# EAGLE board Qwiic GPS-RTK - ublox NEO-M8P-Panel - Single (EAGLE 9.1.1)
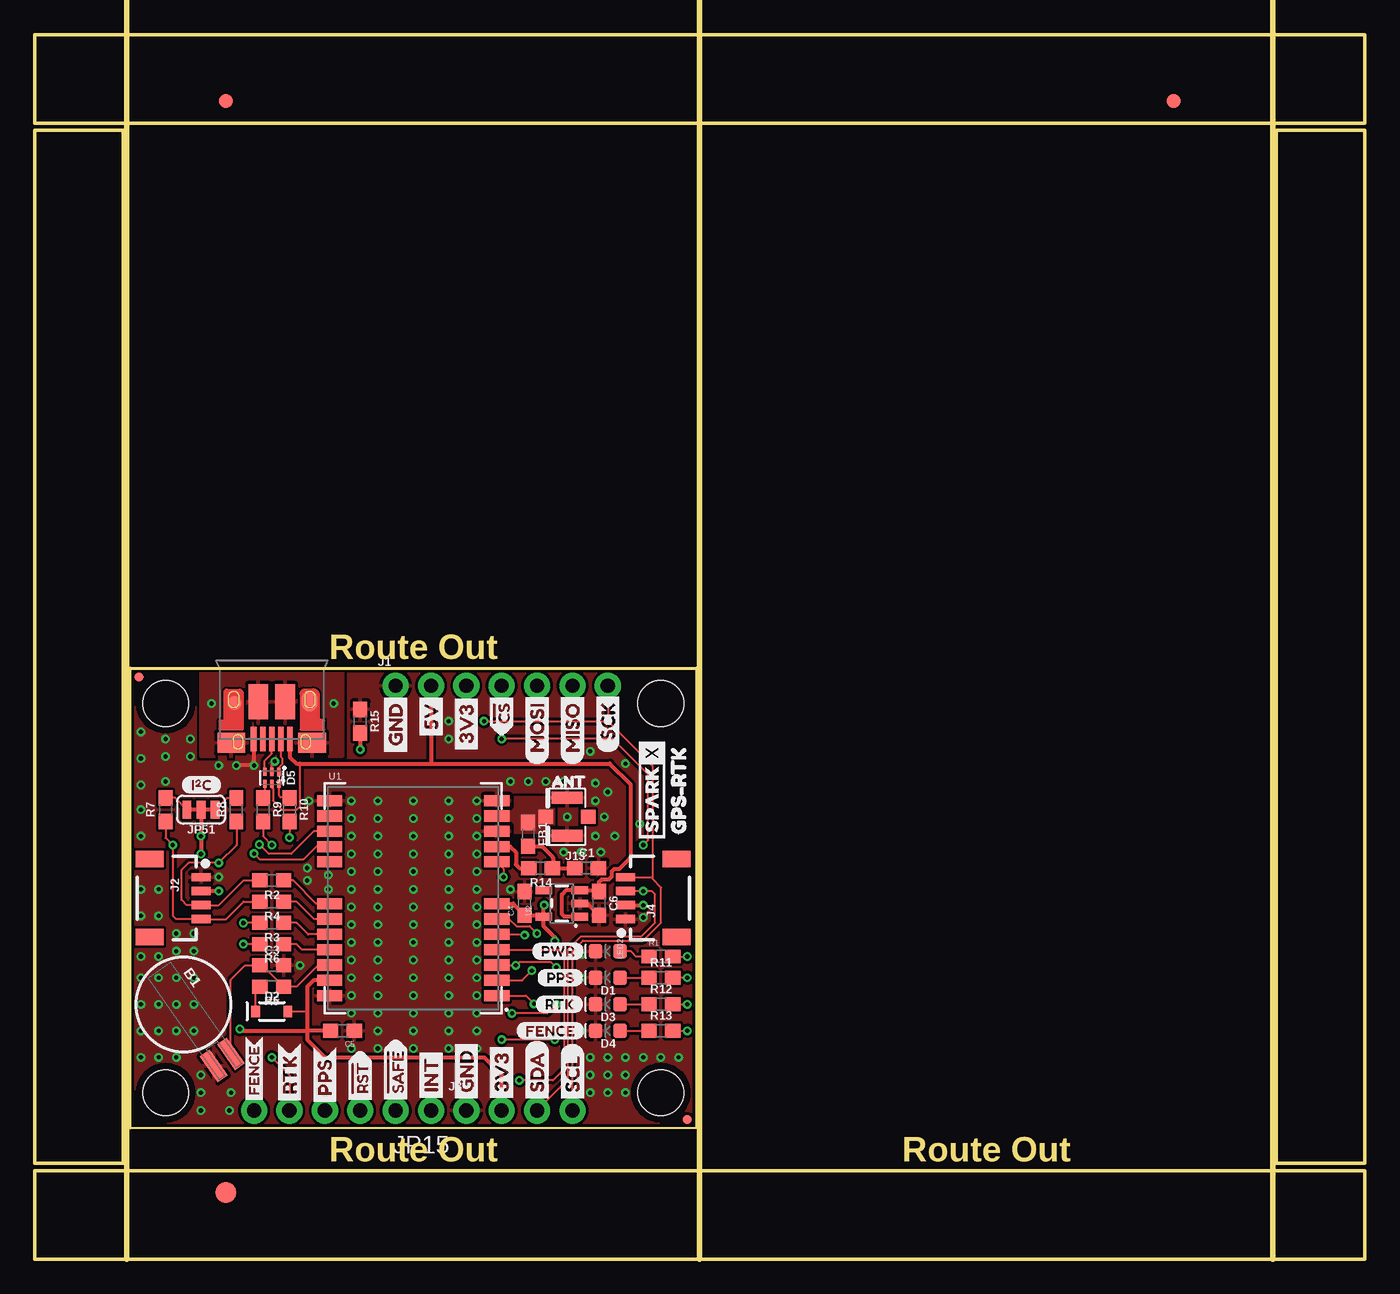
[diagram p0: board, top side]
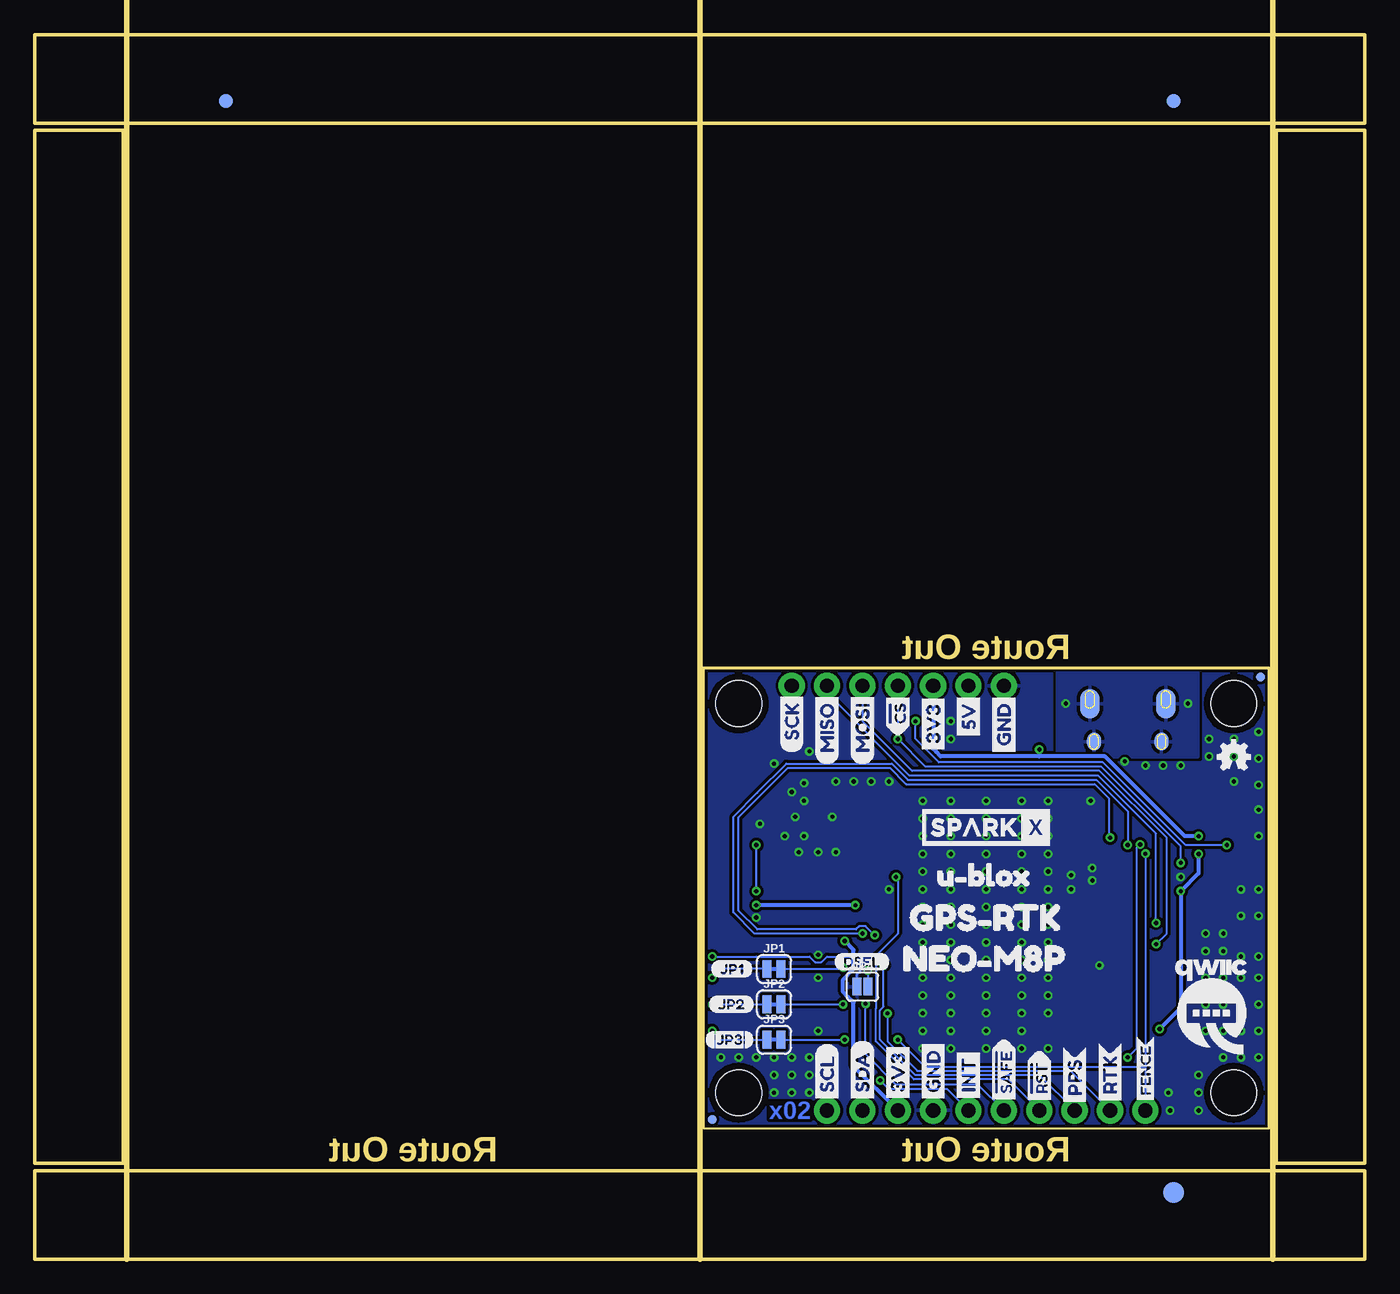
[diagram p1: board, bottom side, seen from below]

Size 95.5 x 87.88 mm. Coordinates in mm from the lower left corner, seen from the top.
Outline: 6.86,9.4 6.86,42.42 47.5,42.42 47.5,9.4 6.86,9.4
Outline: 0,6.35 95.5,6.35 95.5,0 0,0 0,6.35
Outline: 89.15,81.03 95.5,81.03 95.5,6.86 89.15,6.86 89.15,81.03
Outline: 0,87.88 95.5,87.88 95.5,81.53 0,81.53 0,87.88
Outline: 0,81.03 6.35,81.03 6.35,6.86 0,6.86 0,81.03
Copper layers (1*16): Top 0.035mm / dielectric 1.5mm / Bottom 0.035mm
Design rules "SparkFun-2-layer-PCBWay-LIMIT": minimum track width 6mil, minimum drill 0.3mm, track to track 6mil, track to pad 6mil, pad to pad 6mil, via to via 6mil, smd to smd 6mil, copper to edge 6mil, drill to drill 6mil, minimum pad ring 6mil, minimum via ring 6mil, stop-mask expansion 4mil, vias tented up to drill 25mil, thermal gap 10mil
Milling: 3 lines

## Footprints (pad centres in the part's own frame; a part is rotated, then mirrored left to right if it is on the bottom)
BATTCON-6.8MM = smd 2.25 x 0.85: + 4.87,0.75; - 4.87,-0.75
0603 = smd 1.1 x 1: 1 -0.85,0; 2 0.85,0
LED-0603 = smd 1 x 1: A -0.877,0; C 0.877,0
SOD-323 = smd 0.63 x 0.83: A 1.15,0; C -1.15,0
SOT886 = smd 0.61 x 0.25: 1 -0.405,0.5 | smd 0.56 x 0.25: 2 -0.43,0; 3 -0.43,-0.5; 4 0.43,-0.5; 5 0.43,0; 6 0.43,0.5
FIDUCIAL-1X2 = smd 1 x 1: 1 0,0
FIDUCIAL-1.5X3 = smd 1.5 x 1.5: 1 0,0
1X07_NO_SILK = drill 1.016 pad 1.88: 1 0,0; 2 2.54,0; 3 5.08,0; 4 7.62,0; 5 10.16,0; 6 12.7,0; 7 15.24,0
1X04_1MM_RA = smd 0.6 x 1.35: 1 -1.5,0; 2 -0.5,0; 3 0.5,0; 4 1.5,0 | smd 1.2 x 2: NC1 2.8,-3.675; NC2 -2.8,-3.675
1X04_NO_SILK = drill 1.016 pad 1.88: 1 0,0; 2 2.54,0; 3 5.08,0; 4 7.62,0
USB-MICROB-PTH-MILL = smd 0.4 x 1.75: D+ 0,0; D- -0.65,0; GND 1.3,0; ID 0.65,0; VBUS -1.3,0 | smd 2 x 1.46: SHIELD -2.9,0.275; SHIELD2 2.9,0.275 | smd 1.425 x 2.5: SHIELD3 -0.963,-2.675; SHIELD4 0.963,-2.675 | smd 1.4 x 2.1 bottom: SHIELD5 -2.731,-2.531; SHIELD7 2.729,-2.531 | smd 1 x 1: SHIELD6 2.7,-2.575 | smd 1.1 x 1.5: SHIELD8 -2.731,-2.731 | smd 1 x 1.3 bottom: SHIELD9 -2.43,0.195; SHIELD10 2.43,0.195
U.FL = smd 2.2 x 0.85: 1 0,1.375; 2 0,-1.375 | smd 1.05 x 1: FEED 1.525,0; NC -1.525,0
SMT-JUMPER_2_NC_TRACE_SILK = smd 0.635 x 1.27: 1 -0.508,0; 2 0.508,0
SMT-JUMPER_2_NO_SILK = smd 0.635 x 1.27: 1 -0.406,0; 2 0.406,0
1X06_NO_SILK = drill 1.016 pad 1.88: 1 0,0; 2 2.54,0; 3 5.08,0; 4 7.62,0; 5 10.16,0; 6 12.7,0
MICRO-FIDUCIAL = smd 0.635 x 0.635: 1 0,0
STAND-OFF = hole 3.302: 0,0
SMT-JUMPER_3_2-NC_TRACE_SILK = smd 0.635 x 1.27: 1 -1.016,0; 2 0,0; 3 1.016,0
NEO-M8P = smd 1.8 x 0.8: 1 6,-7; 2 6,-5.9; 3 6,-4.8; 4 6,-3.7; 5 6,-2.6; 6 6,-1.5; 7 6,-0.4; 8 6,2.6; 9 6,3.7; 10 6,4.8; 11 6,5.9; 12 6,7; 13 -6,7; 14 -6,5.9; 15 -6,4.8; 16 -6,3.7; 17 -6,2.6; 18 -6,-0.4; 19 -6,-1.5; 20 -6,-2.6; 21 -6,-3.7; 22 -6,-4.8; 23 -6,-5.9; 24 -6,-7
SOT23-5 = smd 0.55 x 1.2: 1 -0.95,-1.3; 2 0,-1.3; 3 0.95,-1.3; 4 0.95,1.3; 5 -0.95,1.3

## Placement (x,y rotation side)
B1  6.8MM_COIN_CELL  [BATTCON-6.8MM]  10.67,18.29 305 top
C1  47pF  [0603]  39.62,28.07 0 top
C3  1.0uF  [0603]  17.02,21.08 0 top
C4  1.0uF  [0603]  35.18,25.53 90 top
C5  0.1uF  [0603]  22.1,16.38 180 top
C6  1.0uF  [0603]  40.51,25.53 270 top
D1  BLUE  [LED-0603]  41.15,20.19 180 top
D2  0.5A/40V/420mV  [SOD-323]  17.02,17.78 0 top
D3  GREEN  [LED-0603]  41.15,18.29 180 top
D4  BLUE  [LED-0603]  41.15,16.38 180 top
D5  PRTR5V0U2F  [SOT886]  17.02,34.54 270 top
E$1  [FIDUCIAL-1X2]  13.72,83.12 0 top
E$2  [FIDUCIAL-1X2]  13.72,83.12 0 bottom
E$3  [FIDUCIAL-1X2]  81.79,83.12 0 top
E$4  [FIDUCIAL-1X2]  81.79,83.12 0 bottom
E$5  [FIDUCIAL-1.5X3]  13.72,4.76 0 top
E$6  [FIDUCIAL-1.5X3]  13.72,4.76 0 bottom
FB1  30Ω/1.8A  [0603]  35.43,30.48 270 top
J1  [1X07_NO_SILK]  25.91,41.15 0 top
J2  [1X04_1MM_RA]  11.94,25.91 270 top
J3  PTH  [1X04_NO_SILK]  30.99,10.67 0 top
J4  [1X04_1MM_RA]  42.42,25.91 90 top
J6  [USB-MICROB-PTH-MILL]  17.02,37.34 180 top
J13  U.FL  [U.FL]  38.23,31.75 180 top
JP1  [SMT-JUMPER_2_NC_TRACE_SILK]  42.42,20.83 0 bottom
JP2  [SMT-JUMPER_2_NC_TRACE_SILK]  42.42,18.29 0 bottom
JP3  [SMT-JUMPER_2_NC_TRACE_SILK]  42.42,15.75 0 bottom
JP4  [SMT-JUMPER_2_NO_SILK]  36.07,19.56 0 bottom
JP15  SPI  [1X06_NO_SILK]  28.45,10.67 180 top
JP21  FIDUCIALUFIDUCIAL  [MICRO-FIDUCIAL]  46.86,10.03 0 top
JP31  STAND-OFF  [STAND-OFF]  9.4,39.88 0 top
JP41  STAND-OFF  [STAND-OFF]  44.96,39.88 0 top
JP51  [SMT-JUMPER_3_2-NC_TRACE_SILK]  11.94,32.26 180 top
JP61  FIDUCIALUFIDUCIAL  [MICRO-FIDUCIAL]  7.49,41.78 0 top
JP71  FIDUCIALUFIDUCIAL  [MICRO-FIDUCIAL]  46.86,10.03 0 bottom
JP81  FIDUCIALUFIDUCIAL  [MICRO-FIDUCIAL]  7.49,41.78 0 bottom
JP91  STAND-OFF  [STAND-OFF]  9.4,11.94 0 top
JP101  STAND-OFF  [STAND-OFF]  44.96,11.94 0 top
LED2  RED  [LED-0603]  41.15,22.1 180 top
LOGO1  OSHW-LOGOMINI  [OSHW-LOGO-MINI]  9.4,36.07 0 bottom
R1  1k  [0603]  44.96,21.72 0 top
R2  33  [0603]  17.02,27.18 180 top
R3  33  [0603]  17.02,24.13 180 top
R4  33  [0603]  17.02,25.65 180 top
R5  1k  [0603]  17.02,19.56 180 top
R6  33  [0603]  17.02,22.61 180 top
R7  2.2k  [0603]  9.4,32.26 90 top
R8  2.2k  [0603]  14.48,32.26 90 top
R9  27  [0603]  16.38,32.26 270 top
R10  27  [0603]  18.29,32.26 270 top
R11  1k  [0603]  44.96,20.19 0 top
R12  1k  [0603]  44.96,18.29 0 top
R13  1k  [0603]  44.96,16.38 0 top
R14  10  [0603]  36.32,28.07 180 top
R15  100k  [0603]  23.37,38.61 270 top
U1  NEO-M8P  [NEO-M8P]  27.18,25.91 0 top
U2  3.3V  [SOT23-5]  37.85,25.53 90 top
U$1  [SDA-[)]  36.07,11.05 90 top
U$2  SPARKX-LOGO4  [SPARKX-MEDIUM]  27.18,30.99 0 bottom
U$3  [SCL-[)]  38.61,11.05 90 top
U$4  [SDA-[)]  36.07,11.05 90 bottom
U$5  [SCL-[)]  38.61,11.05 90 bottom
U$6  [3V3-04]  33.53,11.05 90 top
U$7  [3V3-04]  33.53,11.05 90 bottom
U$8  [GND-04]  30.99,11.05 90 top
U$9  [GND-04]  30.99,11.05 90 bottom
U$10  [I_SUPER2_C-()-03]  10.54,34.04 0 top
U$11  [FENCE2]  34.54,16.38 0 top
U$12  [JP20]  47.12,18.29 0 bottom
U$13  [RTK1]  35.94,18.29 0 top
U$14  [FENCE0]  15.75,11.05 90 top
U$15  [INT8]  28.45,11.05 90 top
U$16  [INT8]  28.45,11.05 90 bottom
U$17  [FENCE0]  15.75,11.05 90 bottom
U$18  [PWR-()-03]  35.69,22.1 0 top
U$19  [5V]  28.45,37.08 90 top
U$20  [5V]  28.45,37.08 90 bottom
U$21  [GPS#RTK0]  46.23,29.59 90 top
U$22  [U#BLOX3]  32.13,27.56 0 bottom
U$23  [CS#-<]]  33.53,37.34 90 top
U$24  [CS#-<]]  33.53,37.34 90 bottom
U$25  [JP10]  46.99,20.83 0 bottom
U$26  [MISO-(]-04]  38.61,35.43 90 top
U$27  [DSEL0]  38.1,21.34 0 bottom
U$28  [RTK1]  18.29,10.92 90 bottom
U$29  [RTK1]  18.29,10.92 90 top
U$30  [QWIIC-LOGO-MEDIUM]  11.05,18.16 0 bottom
U$31  SPARKX-LOGO3  [SPARKX-SMALL]  44.32,33.66 90 top
U$32  [JP32]  47.37,15.75 0 bottom
U$33  [MISO-(]-04]  38.61,35.43 90 bottom
U$34  [MOSI-(]-04]  36.07,35.43 90 top
U$35  [#RST3]  23.37,10.79 90 top
U$36  [#RST3]  23.37,10.79 90 bottom
U$37  [MOSI-(]-04]  36.07,35.43 90 bottom
U$38  [SCK-(]-04]  41.15,36.32 90 top
U$39  [#SAFE1]  25.91,10.79 90 top
U$40  [#SAFE1]  25.91,10.79 90 bottom
U$41  [SCK-(]-04]  41.15,36.32 90 bottom
U$43  [PPS5]  20.83,10.79 90 top
U$44  [PPS5]  20.83,10.79 90 bottom
U$52  [PPS0]  36.07,20.19 0 top
U$53  [NEO#M8P3]  34.8,21.59 0 bottom
U$54  [GPS#RTK1]  34.29,24.51 0 bottom
U$55  [ANT0]  36.45,34.29 0 top
U$60  [3V3-04]  30.99,36.07 90 bottom
U$61  [3V3-04]  30.99,36.07 90 top
U$62  [GND-04]  25.91,35.94 90 bottom
U$63  [GND-04]  25.91,35.94 90 top

## Library data of the parts
B1 = SparkFun-Batteries; PROD_ID: BATT-13734
C1 = SparkFun-Capacitors; PROD_ID: CAP-08913
C3 C4 C6 = SparkFun-Capacitors; PROD_ID: CAP-00868
C5 = SparkFun-Capacitors; PROD_ID: CAP-00810
D1 D4 = SparkFun-LED; PROD_ID: DIO-08575
D2 = SparkFun-DiscreteSemi; PROD_ID: DIO-10955
D3 = SparkFun-LED; PROD_ID: DIO-00821
D5 = funbit
E$1-E$4 LOGO1 = SparkFun-Aesthetics
E$5 E$6 = SparkFun-Retired
FB1 = SparkFun-Coils; PROD_ID: NDUC-13805
J1 = SparkFun-Connectors
J2 J4 = SparkFun-Connectors; PROD_ID: CONN-13694; VALUE: Qwiic Right Angle
J3 U$2 U$31 = SparkX
J6 = SparkFun-Connectors; PROD_ID: CONN-13711
J13 = SparkFun-Connectors; PROD_ID: CONN-09193; SF_ID: WRL-09144
JP1-JP4 JP51 = SparkFun-Jumpers
JP15 = SparkFun-Connectors; PROD_ID: CONN-08437
JP21 JP31 JP41 JP61 JP71 JP81 JP91 JP101 = SparkFun
LED2 = SparkFun-LED; PROD_ID: DIO-00819
R1 R5 R11-R13 = SparkFun-Resistors; PROD_ID: RES-07856
R2-R4 R6 = SparkFun-Resistors; PROD_ID: RES-08270
R7 R8 = SparkFun-Resistors; PROD_ID: RES-08272
R9 R10 = SparkFun-Resistors; PROD_ID: RES-09334
R14 = SparkFun-Resistors; PROD_ID: RES-12581
R15 = SparkFun-Resistors; PROD_ID: RES-07828
U1 = NEO-M8P
U2 = SparkFun-IC-Power; PROD_ID: VREG-12457
U$1 U$3-U$10 U$18-U$20 U$23 U$24 U$26 U$30 U$33 U$34 U$37 U$38 U$41 U$60-U$63 = Labels
U$11-U$13 = buzzard_labels
U$14 U$17 U$28 U$29 = buzzard_labels (1)
U$15 U$16 U$22 U$25 U$32 = buzzard_labels (5)
U$21 = buzzard_labels (3)
U$27 = buzzard_labels (6)
U$35 U$36 U$39 U$40 U$43 U$44 U$53 = buzzard_labels (7)
U$52 = buzzard_labels (33)
U$54 = buzzard_labels (8)
U$55 = buzzard_labels (9)

## Nets
3.3V: C4.1 C5.2 D2.A J1.3 J2.2 J3.2 J4.2 JP51.2 R1.2 R15.2 U1.7 U1.23 U2.5
5V: C6.1 D5.5 J1.2 J6.VBUS U2.1 U2.3
!RESET: JP15.3 U1.8
!SAFE: JP15.2 U1.1
ANT_VCC: C1.1 FB1.2 R14.1
BACKUP: B1.+ C3.1 R5.1 U1.22
D+: D5.4 R9.1
D-: D5.6 R10.1
D_SEL: JP4.2 U1.2
FENCE_STAT: JP3.2 JP15.6 U1.16
GND: B1.- C1.2 C3.2 C4.2 C5.1 C6.2 D1.C D3.C D4.C D5.2 J1.1 J2.1 J3.1 J4.1 J6.GND J13.1 J13.2 JP4.1 LED2.C R15.1 U1.10 U1.12 U1.13 U1.24 U2.2
GPS_ANT1: FB1.1 J13.FEED U1.11
INT: JP15.1 U1.4
N$1: D3.A R12.1
N$2: D1.A R11.1
N$3: JP2.1 R12.2
N$4: JP1.1 R11.2
N$5: JP51.1 R8.2
N$6: D2.C R5.2
N$7: D4.A R13.1
N$8: JP51.3 R7.2
N$9: JP3.1 R13.2
N$10: LED2.A R1.1
N$11: R9.2 U1.6
N$12: R10.2 U1.5
N$13: R14.2 U1.9
PPS: JP1.2 JP15.4 U1.3
RTK_STAT: JP2.2 JP15.5 U1.15
RXI/MOSI: J1.5 R6.2
RXLV: R6.1 U1.21
SCL/SCK: J1.7 J2.4 J3.4 J4.4 R4.2 R7.1
SCL_LV: R4.1 U1.19
SDA/!CS: J1.4 J2.3 J3.3 J4.3 R2.2 R8.1
SDA_LV: R2.1 U1.18
SHLD: J6.SHIELD J6.SHIELD2 J6.SHIELD3 J6.SHIELD4 J6.SHIELD5 J6.SHIELD6 J6.SHIELD7 J6.SHIELD8 J6.SHIELD9 J6.SHIELD10
TXLV: R3.1 U1.20
TXO/MISO: J1.6 R3.2
USB_D+: D5.3 J6.D+
USB_D-: D5.1 J6.D-

## Tracks (layer width: path | path; a pad name or v marks a point on that pad's centre or on a via)
3.3V  (via drill 0.3)
  Top 0.152: v11.94,30.35 JP51.2 | R1.2 v46.86,21.72 | D2.A 19.56,17.78
  Top 0.305: v13.21,26.41 J2.2 | JP51.2 v11.94,29.08 | U1.7 34.35,25.51 C4.1 36.45,24.68 U2.5 | U2.5 36.55,25.37 v36.58,25.4 | J4.2 v43.69,25.4 | v37.34,22.84 37.34,23.11 36.55,23.91 U2.5 | J3.2 33.53,13.21 32.26,14.48 20.83,14.48 19.56,15.75 19.56,16.38 | U1.23 20.01,20.01 19.56,19.56 19.56,17.78 19.56,16.38 | C5.2 19.56,16.38 | v14.73,16.51 14.86,16.38 19.56,16.38 | R15.2 v23.37,36.58
  Bottom 0.152: v46.86,21.72 43.69,21.72 39.87,21.72 39.46,21.31 39.02,21.31 38.62,21.72 36.7,21.72
  Bottom 0.305: v11.94,30.35 12.93,30.35 18.67,36.09 23.37,36.09 | v11.94,29.08 11.94,27.68 v13.21,26.41 13.21,18.03 v14.73,16.51 | v36.58,25.4 38.58,25.4 v43.69,25.4 | J3.2 36.7,13.84 36.7,18.41 36.91,18.62 36.92,18.62 37.1,18.8 37.1,18.81 37.46,19.18 37.46,20.07 36.7,20.83 36.7,21.72 36.7,22.2 v37.34,22.84 | J1.3 30.99,36.63 30.77,36.41 30.46,36.09 23.37,36.09 | v23.37,36.58 23.37,36.09
5V
  Top 0.152: D5.5 17.02,33.85 17.11,33.75 17.11,32.91 17.77,32.26 18.81,32.26 19.05,32.5 19.05,35.56
  Top 0.254: 40.47,26.42 C6.1
  Top 0.305: J6.VBUS 18.32,36.04 18.8,35.56 19.05,35.56 28.45,35.56 | 40.47,26.42 40.51,26.45 40.49,26.48 U2.3 38.16,26.48 37.85,26.16 37.85,24.77 38.03,24.58 U2.1 | 28.45,35.56 41.27,35.56 42.8,34.04 42.8,28.83 41.98,28.01 41.62,28.01 41.44,27.83 41.44,27.47 41.23,27.26 40.72,27.26 40.51,27.05 C6.1 | J1.2 28.45,35.56
!RESET  (via drill 0.3)
  Top 0.152: U1.8 33.66,28.03 v33.66,27.43
  Bottom 0.152: JP15.3 25.6,12.9 32.38,12.9 35.1,15.62 35.1,17.98 35.08,18.01 35.08,20.16 35.08,21.82 33.53,23.37 33.53,27.3 v33.66,27.43
!SAFE  (via drill 0.3)
  Top 0.152: U1.1 35.26,18.91 v35.85,18.32
  Bottom 0.152: JP15.2 27.76,12.52 33.65,12.52 35.87,14.73 35.87,18.31 v35.85,18.32
ANT_VCC
  Top 0.305: R14.1 37.34,28.07 | 37.34,28.07 C1.1 | FB1.2 36.41,29.63 37.21,28.83 37.21,28.19 37.34,28.07
BACKUP
  Top 0.152: U1.22 20.35,21.11 18.8,19.56 R5.1 16.34,21.08 C3.1 15.11,21.08 14.08,20.05 B1.+
D+
  Top 0.152: D5.4 16.52,33.24 R9.1
D-
  Top 0.152: D5.6 17.52,33.28 17.65,33.15 18.25,33.15 R10.1
D_SEL  (via drill 0.3)
  Top 0.152: U1.2 34.99,20.01 v35.69,20.7
  Bottom 0.152: v35.69,20.7 35.69,19.58 JP4.2
FENCE_STAT  (via drill 0.3)
  Top 0.152: v37.34,15.75 v33.53,15.75 | U1.16 20.21,29.61 19.3,28.7 16.15,28.7 v15.75,29.1
  Bottom 0.152: JP3.2 v37.34,15.75 | v33.53,15.75 31.6,13.82 15.77,13.82 15.75,13.84 | v15.75,29.1 15.75,13.84 | 15.75,13.84 JP15.6
GND  (via drill 0.3)
  Top 0.152: D5.2 17.02,35.53 v17.23,35.73
  Top 0.305: J6.GND 15.72,35.43 v14.48,35.43 | U2.2 39.66,25.53 C6.2
  Bottom 0.152: 36.22,20.68 36.22,20.92 36.2,20.95 | JP4.1 36.47,20.42 36.22,20.68 | 36.22,20.68 36.22,21.44 36.07,21.59
  other vias: 13.21,27.43 39.24,20.19 39.24,21.84 39.24,16.38 39.88,13.21 22.73,18.92 24.64,18.92 14.1,11.94 19.05,21.08 19.68,32.89 43.69,24.51 41.15,33.53 27.18,18.92 29.72,18.92 31.75,18.92 22.73,20.19 24.64,20.19 27.18,20.19 29.72,20.19 31.75,20.19 22.73,21.46 24.64,21.46 27.18,21.46 29.72,21.46 31.75,21.46 22.73,22.73 24.64,22.73 27.18,22.73 29.72,22.73 31.75,22.73 22.73,24 24.64,24 27.18,24 29.72,24 31.75,24 22.73,25.27 24.64,25.27 27.18,25.27 29.72,25.27 31.75,25.27 22.73,26.54 24.64,26.54 27.18,26.54 29.72,26.54 31.75,26.54 22.73,27.81 24.64,27.81 27.18,27.81 29.72,27.81 31.75,27.81 22.73,29.08 24.64,29.08 27.18,29.08 29.72,29.08 31.75,29.08 22.73,30.35 24.64,30.35 27.18,30.35 29.72,30.35 31.75,30.35 22.73,31.62 24.64,31.62 27.18,31.62 29.72,31.62 31.75,31.62 22.73,32.89 24.64,32.89 27.18,32.89 29.72,32.89 31.75,32.89 37.97,29.21 40.26,30.35 40.26,32.89 43.43,31.24 39.88,36.45 42.42,35.56 29.72,37.34 29.72,38.61 38.23,31.75 34.16,26.54 39.88,11.94 42.42,11.94 42.42,13.21 44.96,14.48 13.97,10.67 11.94,10.67 11.94,11.94 7.62,34.04 7.62,35.94 7.62,37.85 9.4,37.34 7.62,24.64 7.62,26.54 7.62,30.35 7.62,32.26 7.62,14.48 7.62,16.38 7.62,18.29 7.62,20.19 7.62,21.72 8.89,14.48 8.89,16.38 8.89,18.29 8.89,20.19 8.89,21.72 10.16,14.48 10.16,16.38 10.16,18.29 10.16,20.19 10.16,22.1 11.94,13.21 11.43,16.38 11.43,18.29 11.43,20.19 11.43,22.1 22.73,17.65 24.64,17.65 27.18,17.65 29.72,17.65 31.75,17.65 24.64,16.38 27.18,16.38 29.72,16.38 31.75,16.38 22.73,15.11 24.64,15.11 27.18,15.11 29.72,15.11 31.75,15.11 9.4,34.29 9.4,36.07 11.18,36.07 11.18,37.34 15.75,35.43 13.21,35.43 21.08,26.54 21.08,27.56 19.56,27.18 19.56,28.07 41.15,11.94 41.15,13.21 39.88,14.48 41.15,14.48 42.42,14.48 43.69,14.48 46.23,14.48 10.16,23.37 11.43,23.37 8.89,24.64 8.89,26.54 39.24,29.21 40.64,29.21 40.89,31.75 40.26,34.16 41.66,30.35 36.7,34.29 37.97,34.29 35.43,34.29 34.16,34.29
  pour Top (isolate 0.203, rank 4): 6.86,42.42 47.5,42.42 47.5,9.4 6.86,9.4
  pour Bottom (isolate 0.203, rank 4): 6.86,42.42 47.5,42.42 47.5,9.4 6.86,9.4
GPS_ANT1
  pour Top (isolate 0.305, no thermals): 33.2,33.15 33.2,30.6 37.34,30.6 37.34,33.15
INT  (via drill 0.3)
  Top 0.152: U1.4 37.61,22.21 38,21.82 38,13.61 37.21,12.83 v34.8,12.83
  Bottom 0.152: JP15.1 29.97,12.19 34.16,12.19 v34.8,12.83
N$1
  Top 0.152: D3.A R12.1
N$2
  Top 0.152: D1.A R11.1
N$3  (via drill 0.3)
  Top 0.152: R12.2 v46.86,18.29
  Bottom 0.152: v46.86,18.29 JP2.1
N$4  (via drill 0.3)
  Top 0.152: v46.86,20.19 R11.2
  Bottom 0.152: JP1.1 46.23,20.83 v46.86,20.19
N$5
  Top 0.152: JP51.1 13.8,33.11 R8.2
N$6
  Top 0.152: D2.C 15.87,19.26 R5.2
N$7
  Top 0.152: D4.A R13.1
N$8
  Top 0.152: JP51.3 10.07,33.11 R7.2
N$9  (via drill 0.3)
  Top 0.152: R13.2 v46.86,16.38
  Bottom 0.152: v46.86,16.38 46.23,15.75 JP3.1
N$10
  Top 0.152: R1.1 43.18,21.72 42.8,22.1 LED2.A
N$11  (via drill 0.3)
  Top 0.152: R9.2 16.38,30.35 v17.02,29.72 | v36.07,23.37 35.54,23.9 34.58,23.9 34.07,24.41 U1.6
  Bottom 0.152: v36.07,23.37 43.81,23.37 45.34,24.89 45.34,31.75 43.62,33.47 41.53,35.56 33.96,35.56 32.8,34.41 19.27,34.41 17.89,33.03 17.02,32.16 v17.02,29.72
N$12  (via drill 0.3)
  Top 0.152: R10.2 v18.29,30.25 | U1.5 35.12,23.31 v35.18,23.25
  Bottom 0.152: v18.29,30.25 18.36,30.33 18.36,33.07 18.81,33.52 19.39,34.1 32.93,34.1 34.09,35.25 41.4,35.25 44.96,31.7 44.96,25.02 43.61,23.67 36.52,23.67 36.29,23.9 35.85,23.9 35.2,23.25 v35.18,23.25
N$13
  Top 0.305: U1.9 34.15,29.61 34.54,29.21 34.54,28.32 34.8,28.07 R14.2
PPS  (via drill 0.3)
  Top 0.152: U1.3 34.52,21.11 v34.54,21.08 34.78,21.32 37.07,21.32 v37.45,20.94
  Bottom 0.152: JP15.4 23.37,13.21 32.26,13.21 34.8,15.75 34.8,17.86 34.54,18.11 v34.54,21.08 | JP1.2 37.56,20.83 v37.45,20.94
RTK_STAT  (via drill 0.3)
  Top 0.152: v37.46,18.29 36.81,17.64 v34.27,17.64 | U1.15 20.04,30.71 18.41,29.08 16.81,29.08 v16.13,29.76 | v17.02,14.48 18.29,13.21 JP15.5
  Bottom 0.152: JP2.2 v37.46,18.29 | v34.27,17.64 34.27,15.65 32.13,13.51 21.13,13.51 JP15.5 | v17.02,14.48 16.38,15.11 16.38,29.51 v16.13,29.76
RXI/MOSI  (via drill 0.3)
  Top 0.152: R6.2 v14.99,22.61
  Bottom 0.152: v14.99,22.61 14.22,23.37 14.22,30.23 19.05,35.05 32.51,35.05 36.07,38.61 J1.5
RXLV
  Top 0.152: U1.21 19.19,22.21 18.8,22.61 R6.1
SCL/SCK  (via drill 0.3)
  Top 0.152: R4.2 14.99,25.65 13.74,24.41 J2.4 10.14,24.41 9.91,24.64 v9.91,29.72 9.4,30.23 R7.1 | J3.4 38.61,22.1 39.37,22.86 43.69,22.86 44.98,24.16 44.98,26.67 44.35,27.3 44.35,27.43 | 44.35,27.43 44.35,35.41 41.15,38.61 | v32.26,38.61 41.15,38.61 | 44.35,27.43 44.32,27.41 J4.4 | J1.7 41.15,38.61
  Bottom 0.152: v9.91,29.72 12.85,29.72 18.8,35.66 30.58,35.66 32.26,37.34 v32.26,38.61
SCL_LV
  Top 0.152: U1.19 20.04,24.41 18.8,25.65 R4.1
SDA/!CS  (via drill 0.3)
  Top 0.152: R2.2 14.99,27.18 13.22,25.41 J2.3 10.91,25.41 10.54,25.78 10.54,27.94 11.05,28.45 v13.21,28.45 14.48,29.72 R8.1 | J3.3 38.3,12.9 38.3,22.22 39.24,23.16 43.56,23.16 44.55,24.16 44.55,26.17 44.31,26.41 v43.69,26.41 J4.3 | v33.53,37.34 41.5,37.34 44.04,34.8 44.04,30.07 v43.69,29.72
  Bottom 0.152: v13.21,28.45 13.21,29.64 18.92,35.36 31.55,35.36 v33.53,37.34 J1.4 | v43.69,26.41 v43.69,29.72
SDA_LV
  Top 0.152: U1.18 20.21,25.51 18.54,27.18 R2.1
SHLD  (via drill 0.3)
  other vias: 21.46,39.88 12.7,39.88
  pour Bottom: 22.1,42.42 22.1,36.07 11.94,36.07 11.94,42.42
  pour Top: 22.1,42.42 22.1,36.07 11.94,36.07 11.94,42.42
TXLV
  Top 0.152: U1.20 19.62,23.31 18.8,24.13 R3.1
TXO/MISO  (via drill 0.3)
  Top 0.152: R3.2 v14.99,24.13
  Bottom 0.152: v14.99,24.13 14.99,30.56 19.14,34.71 32.68,34.71 38.61,40.64 J1.6
USB_D+
  Top 0.152: D5.3 16.52,35.78 17.02,36.28 J6.D+
USB_D-
  Top 0.152: D5.1 17.52,35.27 17.76,35.51 17.76,35.95 17.67,36.05 J6.D-

## Text on the board
Bottom: x02
Dimension: Route Out | Route Out | Route Out
Milling: v-score | v-score | v-score